# EAGLE board ControlModule (EAGLE 7.4.0)
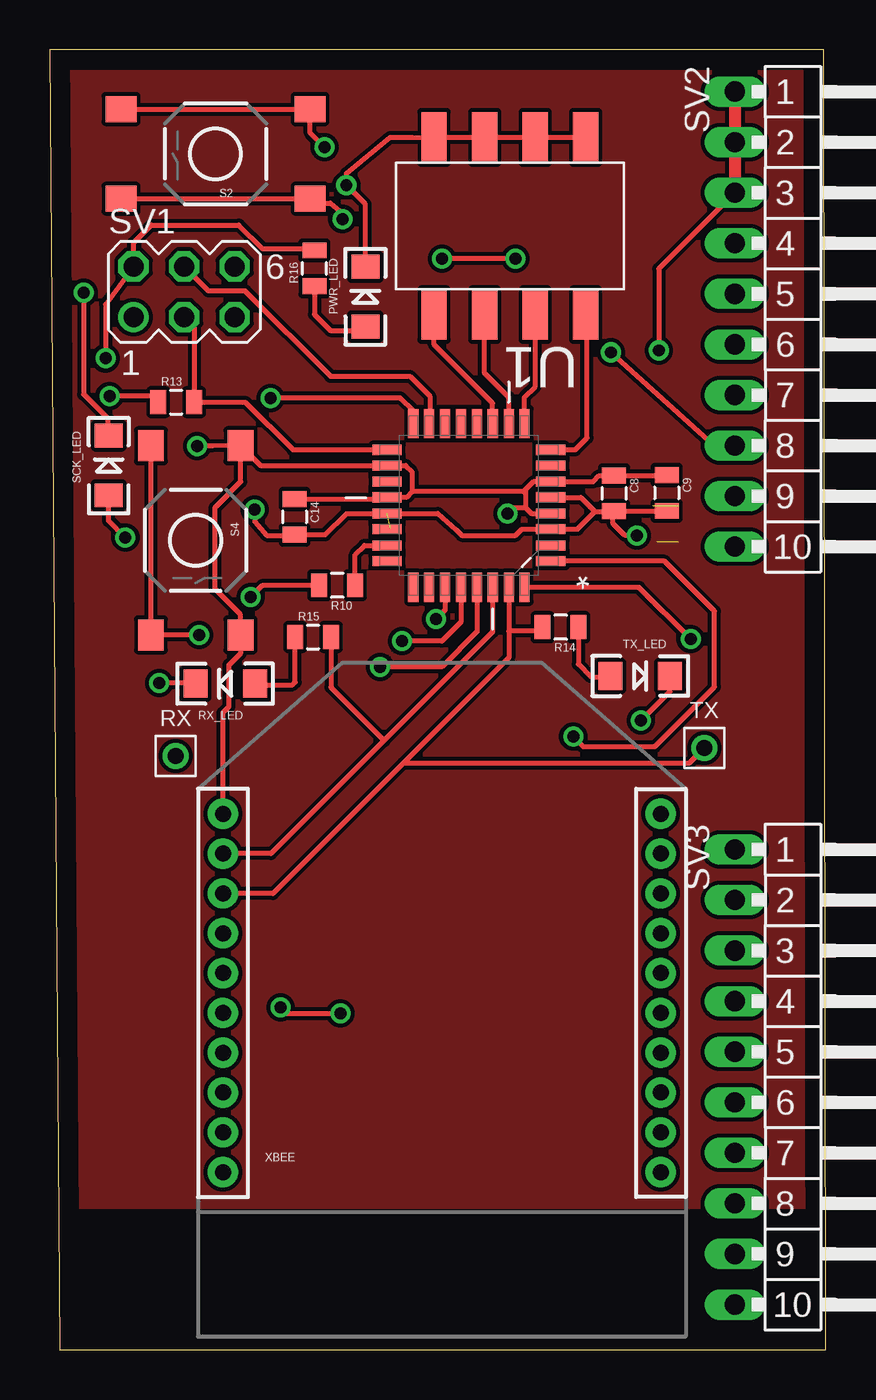
[diagram p0: board, top side]
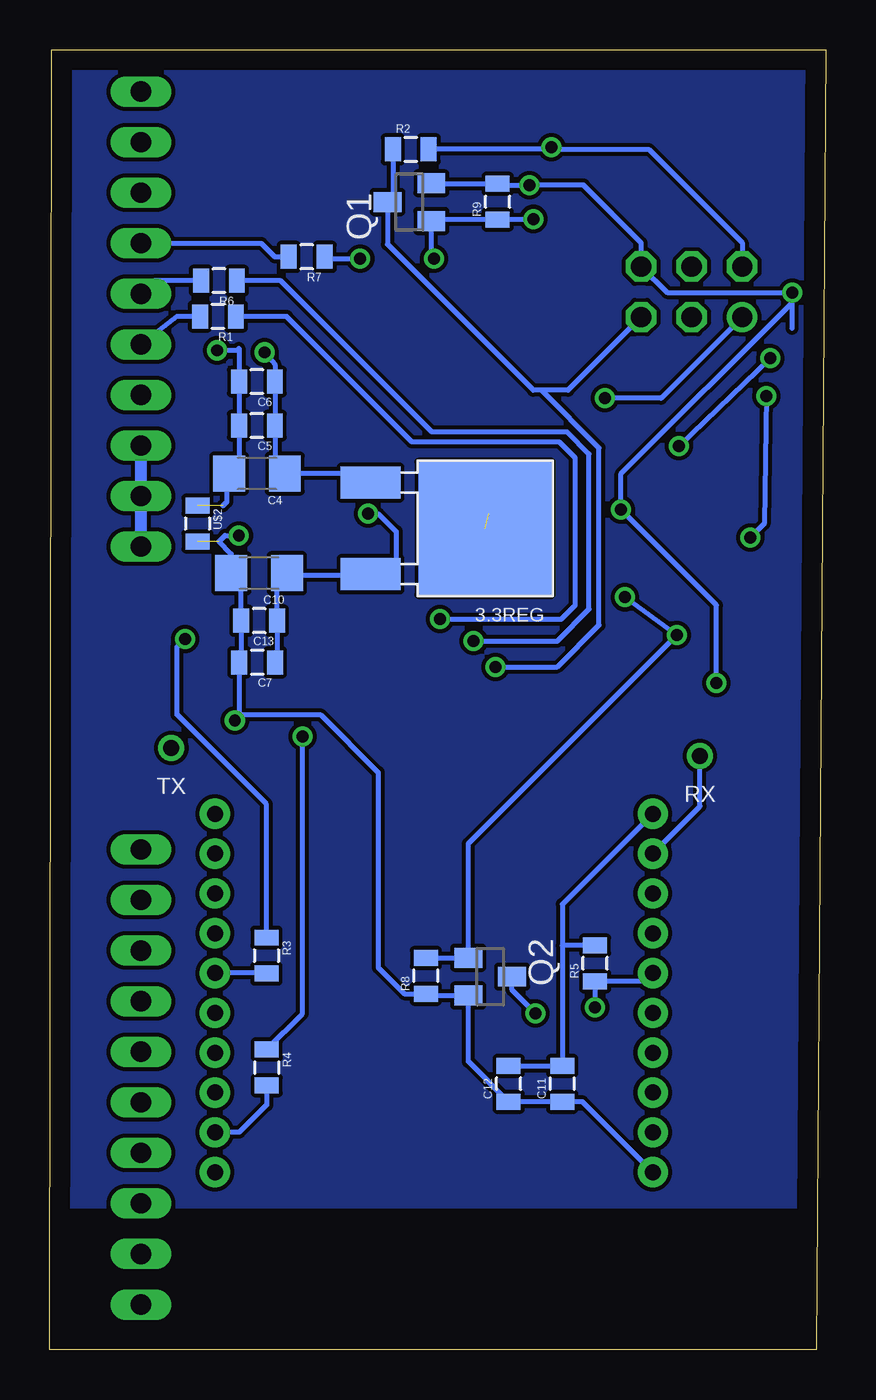
[diagram p1: board, bottom side, seen from below]

Size 39 x 65.3 mm. Coordinates in mm from the lower left corner, seen from the top.
Outline: 0.5,0 39,0 38.9,65.3 0,65.3 0.5,0
Copper layers (1*16): Top 0.035mm / dielectric 1.5mm / Bottom 0.035mm
Design rules "default": minimum track width 10mil, minimum drill 24mil, track to track 8mil, track to pad 8mil, pad to pad 8mil, via to via 8mil, smd to smd 8mil, copper to edge 40mil, drill to drill 8mil, minimum pad ring 10mil, minimum via ring 8mil, stop-mask expansion 4mil, vias tented up to drill 0mil, thermal gap 10mil

## Footprints (pad centres in the part's own frame; a part is rotated, then mirrored left to right if it is on the bottom)
DPAK = smd 6.7 x 6.7: DRAIN 0,0 | smd 3 x 1.6: GATE 5.75,-2.3; SOURCE 5.75,2.3
1206 = smd 1.6 x 1.8: 1 -1.4,0; 2 1.4,0
0805 = smd 0.8 x 1.2: 1 -0.9,0; 2 0.9,0
LED-1206 = smd 1.2 x 1.4: A -1.5,0; C 1.5,0
SOT23 = smd 1 x 1.4: 1 -0.95,-1.1; 2 0.95,-1.1; 3 0,1.1
TESTING_PT = drill 0.8: P$1 0,0
TACTILE-SWITCH-SMD = smd 1.55 x 1.3: 1 -4.75,2.25; 2 4.75,2.25; 3 -4.75,-2.25; 4 4.75,-2.25
MA03-2 = drill 1.016: 1 -2.54,-1.27 | drill 1.016 octagon: 2 -2.54,1.27; 3 0,-1.27; 4 0,1.27; 5 2.54,-1.27; 6 2.54,1.27
MA10-1W = drill 1.016 long: 1 -11.43,0; 2 -8.89,0; 3 -6.35,0; 4 -3.81,0; 5 -1.27,0; 6 1.27,0; 7 3.81,0; 8 6.35,0; 9 8.89,0; 10 11.43,0
QFP80P900X900X120-32N = smd 1.473 x 0.508: 1 -4.115,2.794; 2 -4.115,2.007; 3 -4.115,1.194; 4 -4.115,0.406; 5 -4.115,-0.406; 6 -4.115,-1.194; 7 -4.115,-2.007; 8 -4.115,-2.794; 17 4.115,-2.794; 18 4.115,-2.007; 19 4.115,-1.194; 20 4.115,-0.406; 21 4.115,0.406; 22 4.115,1.194; 23 4.115,2.007; 24 4.115,2.794 | smd 0.508 x 1.473: 9 -2.794,-4.115; 10 -2.007,-4.115; 11 -1.194,-4.115; 12 -0.406,-4.115; 13 0.406,-4.115; 14 1.194,-4.115; 15 2.007,-4.115; 16 2.794,-4.115; 25 2.794,4.115; 26 2.007,4.115; 27 1.194,4.115; 28 0.406,4.115; 29 -0.406,4.115; 30 -1.194,4.115; 31 -2.007,4.115; 32 -2.794,4.115
4-POS-DIP-SMD = smd 1.27 x 2.54: 1 -3.81,4.445; 2 -1.27,4.445; 3 1.27,4.445; 4 3.81,4.445; 5 3.81,-4.445; 6 1.27,-4.445; 7 -1.27,-4.445; 8 -3.81,-4.445
XBEE-1 = drill 0.8 pad 1.524: 1 -11,20; 2 -11,18; 3 -11,16; 4 -11,14; 5 -11,12; 6 -11,10; 7 -11,8; 8 -11,6; 9 -11,4; 10 -11,2; 11 11,2; 12 11,4; 13 11,6; 14 11,8; 15 11,10; 16 11,12; 17 11,14; 18 11,16; 19 11,18; 20 11,20

## Placement (x,y rotation side)
3.3REG  3.3REG1AREG  [DPAK]  17.13,41.26 180 bottom
C4  47uF  [1206]  28.59,44.01 180 bottom
C5  1uF  [0805]  28.59,46.42 180 bottom
C6  0.01uF  [0805]  28.59,48.63 180 bottom
C7  0.01uF  [0805]  28.58,34.53 180 bottom
C8  10uF  [0805]  28.35,43.02 270 top
C9  0.1uF  [0805]  31,43.04 270 top
C10  47uF  [1206]  28.48,39.01 180 bottom
C11  0.01uF  [0805]  13.25,13.36 90 bottom
C12  1uF  [0805]  15.95,13.36 90 bottom
C13  1uF  [0805]  28.48,36.62 180 bottom
C14  0.1uF  [0805]  12.3,41.84 270 top
FRAME1  FRAME-LETTER  [CREATIVE_COMMONS]  -78.24,50.8 0 top  (outside the outline)
PWR_LED  [LED-1206]  15.86,52.9 90 top
Q1  BSS123  [SOT23]  20.93,57.65 90 bottom
Q2  BSS123  [SOT23]  16.87,18.74 270 bottom
R1  100  [0805]  30.55,51.9 180 bottom
R2  10k  [0805]  20.86,60.3 0 bottom
R3  0  [0805]  28.11,19.8 270 bottom
R4  0  [0805]  28.1,14.18 270 bottom
R5  10k  [0805]  11.6,19.41 90 bottom
R6  100  [0805]  30.5,53.7 180 bottom
R7  100  [0805]  26.09,54.9 180 bottom
R8  10k  [0805]  20.1,18.78 90 bottom
R9  10k  [0805]  16.5,57.67 90 bottom
R10  100  [0805]  14.44,38.4 180 top
R13  1k  [0805]  6.35,47.6 0 top
R14  1k  [0805]  25.66,36.3 180 top
R15  1k  [0805]  13.23,35.8 0 top
R16  1k  [0805]  13.3,54.32 90 top
RX  TEST_PT  [TESTING_PT]  6.33,29.82 0 top
RX_LED  [LED-1206]  8.82,33.46 180 top
S2  TAC_SWITCHSMD  [TACTILE-SWITCH-SMD]  8.33,60.07 180 top
S4  TAC_SWITCHSMD  [TACTILE-SWITCH-SMD]  7.33,40.66 270 top
SCK_LED  [LED-1206]  2.96,44.42 90 top
SV1  ICSP  [MA03-2]  6.75,53.14 0 top
SV2  [MA10-1W]  34.42,51.77 270 top
SV3  [MA10-1W]  34.42,13.7 270 top
TX  TEST_PT  [TESTING_PT]  32.89,30.22 0 top
TX_LED  [LED-1206]  29.66,33.84 0 top
U1  ATMEGA328P-AU  [QFP80P900X900X120-32N]  21.06,42.41 180 top
U$1  4-POS-DIP  [4-POS-DIP-SMD]  23.12,56.45 180 top
U$2  INDUCTOR  [0805]  31.58,41.5 270 bottom
XBEE  XBEE-1B1  [XBEE-1]  19.7,6.92 0 top

## Library data of the parts
3.3REG RX TX U$2 = gen3
C4-C14 = SparkFun-Capacitors
FRAME1 = SparkFun-Aesthetics
PWR_LED RX_LED SCK_LED TX_LED = SparkFun-LED
Q1 Q2 = transistor-small-signal
R1-R10 R13-R16 = SparkFun-Passives
S2 S4 = SparkFun-Retired; PROD_ID: SWCH-08247
SV1-SV3 = con-lstb; OC_FARNELL: unknown; OC_NEWARK: unknown
U1 = Atmel_By_element14_Batch_1-00; MPN: ATMEGA328P-AU; OC_FARNELL: 1715486; OC_NEWARK: 14R4631; PACKAGE: TQFP-32; SUPPLIER: Atmel
U$1 = SparkFun-Electromechanical; PROD_ID: SWCH-12418
XBEE = SparkFun-RF

## Nets
3.3V: 3.3REG.SOURCE C7.1 C8.1 C9.1 C10.1 C11.2 C12.2 C13.1 C14.1 R2.2 R5.2 R16.2 S2.3 S2.4 S4.1 S4.2 SV1.2 U1.4 U1.6 U1.18 U1.20 XBEE.1
12V: 3.3REG.GATE C4.1 C5.1 C6.1 SV2.8 SV2.9 SV2.10
12VGND: C4.2 C5.2 C6.2 SV2.1 SV2.2 SV2.3 U$2.1
BID0: U1.8 U$1.1
BID1: U1.9 U$1.2
BID2: U1.10 U$1.3
BID3: U1.11 U$1.4
CTS: R4.1 U1.1
GND: 3.3REG.DRAIN C7.2 C8.2 C9.2 C10.2 C11.1 C12.1 C13.2 C14.2 PWR_LED.C Q1.2 Q2.2 R8.1 R9.2 RX_LED.C SCK_LED.C SV1.6 TX_LED.C U1.3 U1.5 U1.21 U$1.5 U$1.6 U$1.7 U$1.8 U$2.2 XBEE.10
MISO: SV1.1 U1.16
MOSI: SV1.4 U1.15
N$1: R3.2 XBEE.16
N$2: R13.1 SCK_LED.A
N$3: R4.2 XBEE.12
N$5: R1.1 U1.27
N$7: R10.1 U1.23
N$8: R6.1 U1.28
N$9: R14.1 TX_LED.A
N$10: R15.1 RX_LED.A
N$11: PWR_LED.A R16.1
N$12: Q2.1 R8.2 R10.2 S4.3 S4.4
N$13: Q1.1 R7.1 R9.1 S2.1 S2.2
RST: Q1.3 R2.1 SV1.5 U1.29
RST_CTRL: R7.2 SV2.4
RTS: R3.1 U1.32
RX: R15.2 RX.P$1 U1.30 XBEE.2
SCK: R13.2 SV1.3 U1.17
TWCK: R6.2 SV2.5
TWD: R1.2 SV2.6
TX: R14.2 TX.P$1 U1.31 XBEE.3
XBRST: Q2.3 R5.1 XBEE.5

## Tracks (layer width: path | path; a pad name or v marks a point on that pad's centre or on a via)
3.3V  (via drill 0.6)
  Top 0.254: S4.1 10.58,44.42 U1.18 17.88,44.42 18.2,44.1 18.2,43.1 | C9.1 30.98,43.92 C8.1 28.33,43.9 27.6,43.9 27.3,43.6 U1.6 24.3,43.6 23.9,43.2 | 23.9,43.2 23.9,42.3 | 23.9,42.3 24.2,42 U1.4 | C14.1 16.87,42.74 U1.20 17.92,42.82 18.2,43.1 | 23.9,43.2 23.8,43.1 18.2,43.1 | S2.4 S2.3 13.08,61.12 v13.8,60.4 | v23,42 23.3,42.3 23.9,42.3 | S4.1 8.17,45.4 v7.4,45.4 | S4.1 9.6,45.39 9.6,43.6 8.3,42.3 8.3,38.2 9.58,36.92 S4.2 9.58,34.98 9,34.4 9,32.3 8.7,32 XBEE.1 | R16.2 13.22,55.3 10.7,55.3 9.5,56.5 5.1,56.5 4.21,55.61 SV1.2 2.8,52.5 v2.8,49.8
  Bottom 0.254: C12.2 C11.2 13.25,20.3 | XBEE.1 13.25,22.37 13.25,20.3 | v13.8,60.4 13.9,60.3 | 13.9,60.3 R2.2 | C7.1 27.58,34.53 C13.1 27.58,38.9 | 27.58,38.9 27.58,39.01 C10.1 | 13.9,60.3 8.9,60.3 4.21,55.61 SV1.2 | v7.4,45.4 v2.8,49.8 | 3.3REG.SOURCE 22.94,38.9 27.58,38.9 | 3.3REG.SOURCE 22.8,39.04 | v23,42 22.5,42 21.6,41.1 21.6,39.2 21.9,38.9 22.82,38.9 3.3REG.SOURCE | R5.2 13.25,20.3
12V  (via drill 0.6)
  Top 0.254: v28.2,50.1 33.38,45.42 SV2.8
  Bottom 0.254: 3.3REG.GATE 22.88,44.01 C4.1 27.69,44.01 C5.1 C6.1 27.69,49.49 v28.2,50.1
  Bottom 0.61: SV2.8 SV2.9 SV2.10
12VGND  (via drill 0.6)  (1 unrouted)
  Top 0.254: SV2.3 30.6,54.3 v30.6,50.2
  Top 0.61: SV2.1 SV2.2 SV2.3
  Bottom 0.254: 30.3,42.4 30.1,42.6 30.1,43.9 C4.2 29.49,44.51 C5.2 C6.2 29.49,50.2 | 29.49,50.31 29.49,50.2 | v30.6,50.2 29.49,50.2
BID0
  Top 0.254: U1.8 26.4,45.2 27,45.8 27,51.94 U$1.1
BID1
  Top 0.254: U1.9 23.85,47.85 24.39,48.39 U$1.2
BID2
  Top 0.254: U1.10 23.07,47.83 21.85,49.05 U$1.3
BID3
  Top 0.254: U1.11 22.25,47.55 19.31,50.49 U$1.4
CTS  (via drill 0.6)
  Top 0.254: U1.1 30.88,39.62 33.4,37.1 33.4,33.3 30.4,30.3 26.8,30.3 v26.3,30.8
  Bottom 0.254: R4.1 26.3,16.88 v26.3,30.8
GND  (via drill 0.6)  (2 unrouted)
  Top 0.254: U1.5 26.68,42.82 27.4,42.1 | 27.4,42.1 28.33,42.1 C8.2 | C8.2 30.98,42.12 C9.2 | U1.3 26.52,41.22 27.4,42.1 | U$1.8 U$1.7 U$1.6 U$1.5 18.2,60.9 17.1,60.9 14.9,59.1 v14.9,58.5 15.86,57.54 PWR_LED.C | 25.16,41.2 U1.3 | v29.7,31.6 31.16,33.06 TX_LED.C | U1.3 23.72,41.22 23.4,40.9 20.7,40.9 20.4,41.2 19.5,42 U1.21 14.9,42 13.84,40.94 C14.2 12.26,40.9 10.9,40.9 10.3,41.6 v10.3,42.2 | v29.5,40.9 28.9,40.9 28.3,41.5 28.3,42.07 C8.2 | RX_LED.C 7.28,33.5 v5.5,33.5 | v1.7,53.1 1.7,48 2.9,46.8 2.9,45.98 SCK_LED.C
  Bottom 0.254: XBEE.10 12.24,12.46 C11.1 C12.1 17.97,14.48 Q2.2 20.01,17.79 R8.1 21.18,17.88 22.5,19.2 22.5,29 25.4,31.9 29.4,31.9 v29.7,31.6 29.48,31.82 C7.2 29.38,34.53 C13.2 29.38,39.01 C10.2 29.88,39.98 30.5,40.6 30.2,40.9 v29.5,40.9 | Q1.2 19.8,58.57 R9.2 16.43,58.5 v14.9,58.5 12.18,58.5 9.29,55.61 SV1.6 7.98,53.1 v1.7,53.1 1.7,52.6 | 1.7,51.3 1.7,52.6 | v5.5,33.5 5.5,37.4 v10.3,42.2 10.3,44 1.7,52.6
MISO  (via drill 0.6)
  Top 0.254: U1.16 18.27,47.16 17.61,47.82 17.59,47.8 v11.1,47.8
  Bottom 0.254: SV1.1 8.28,47.8 v11.1,47.8
MOSI
  Top 0.254: U1.15 19.1,46.57 19.1,47.9 18.1,48.9 14.1,48.9 9.82,53.18 7.98,53.18 SV1.4
N$1
  Bottom 0.254: R3.2 28.13,18.92 XBEE.16
N$2  (via drill 0.6)
  Top 0.254: R13.1 5.3,47.9 v3,47.9 | v3.8,40.8 2.96,41.64 SCK_LED.A
  Bottom 0.254: v3,47.9 3.1,41.5 v3.8,40.8
N$3
  Bottom 0.254: R4.2 28.1,12.3 29.48,10.92 XBEE.12
N$4
  pour Top: 0.5,7.2 39.8,7.2 39.8,65.3 0.1,65.3
N$5  (via drill 0.6)
  Top 0.254: U1.27 19.87,37.17 v19.4,36.7
  Bottom 0.254: v19.4,36.7 13.3,36.7 12.6,37.4 12.6,44.8 13.4,45.6 20.8,45.6 27.1,51.9 R1.1 29.55,51.4
N$6
  pour Bottom: 0.5,7.2 39.8,7.2 39.7,65.3 -0.1,65.3
N$7
  Top 0.254: R10.1 15.34,39.94 15.8,40.4 U1.23
N$8  (via drill 0.6)
  Top 0.254: U1.28 20.65,36.55 19.7,35.6 v17.7,35.6
  Bottom 0.254: v17.7,35.6 13.5,35.6 11.9,37.2 11.9,45 13,46.1 19.8,46.1 27.4,53.7 R6.1
N$9
  Top 0.254: R14.1 26.56,34.44 27.2,33.8 28.12,33.8 TX_LED.A
N$10
  Top 0.254: 10.08,33.5 RX_LED.A 9.93,33.77 10.3,33.4 12.2,33.4 12.33,33.53 R15.1
N$11
  Top 0.254: R16.1 13.3,52 14.1,51.2 15.66,51.2 PWR_LED.A
N$12  (via drill 0.6)
  Top 0.254: S4.3 S4.4 v7.49,35.91 v7.5,35.9 | v10.1,37.8 10.7,38.4 R10.2
  Bottom 0.254: v10.1,37.8 v7.5,35.9 17.97,25.43 Q2.1 R8.2
N$13  (via drill 0.6)
  Top 0.254: S2.2 S2.1 13.3,57.6 13.5,57.6 | v23.4,54.8 v19.7,54.8 | 13.4,58.1 13.4,57.7 13.5,57.6 | 13.5,57.6 14.1,57.6 14.7,57.1 v14.7,56.8
  Bottom 0.254: R7.1 25.09,54.8 v23.4,54.8 | v19.7,54.8 19.83,54.93 Q1.1 19.76,56.77 R9.1 16.47,56.8 v14.7,56.8
RST  (via drill 0.6)
  Top 0.254: U1.29 21.47,36.07 19.7,34.3 v16.6,34.3
  Bottom 0.254: R2.1 21.76,57.92 Q1.3 22.03,55.53 14.7,48.2 14.3,48.2 | v16.6,34.3 13.5,34.3 11.4,36.4 11.4,45.3 14.3,48.2 | SV1.5 12.96,48.2 14.3,48.2
RST_CTRL
  Bottom 0.254: SV2.4 28.38,55.58 27.7,54.9 R7.2
RTS  (via drill 0.6)
  Top 0.254: U1.32 29.61,38.3 v32.2,35.7
  Bottom 0.254: R3.1 28.11,27.41 32.6,31.9 32.6,35.3 v32.2,35.7
RX
  Top 0.254: U1.30 22.25,36.05 16.8,30.6 | 16.8,30.6 11.12,24.92 XBEE.2 | R15.2 14.13,33.27 16.8,30.6
  Bottom 0.254: XBEE.2 6.33,27.29 RX.P$1
SCK
  Top 0.254: U1.17 12.22,45.2 9.82,47.6 R13.2 7.25,51.37 SV1.3
TWCK
  Bottom 0.254: R6.2 33.76,53.7 SV2.5
TWD
  Bottom 0.254: R1.2 32.62,51.9 SV2.6
TX
  Top 0.254: U1.31 23.07,36.1 | 23.07,36.1 23.07,34.77 17.75,29.45 | 17.75,29.45 11.22,22.92 XBEE.3 | R14.2 24.56,36.1 23.07,36.1 | TX.P$1 32.12,29.45 17.75,29.45
XBRST  (via drill 0.6)
  Top 0.254: v11.6,17.2 11.9,16.9 v14.6,16.9
  Bottom 0.254: XBEE.5 9.11,18.51 R5.1 | 11.83,18.74 R5.1 | R5.1 v11.6,17.2 | v14.6,16.9 15.77,18.07 Q2.3

## Text on the board
Document: Might need to be condensed further. I have some ideas if necessary.